# Altium PCB PAM_Interface_No_Bit_Shift.PcbDoc
Units mm, origin at the board's own origin, x right, y up, seen from the top; angles counter-clockwise.
Board outline 52 x 25 mm, 2 copper layers (Top Layer, Bottom Layer); 17 components, 14 nets, 68 pads, 23 vias.
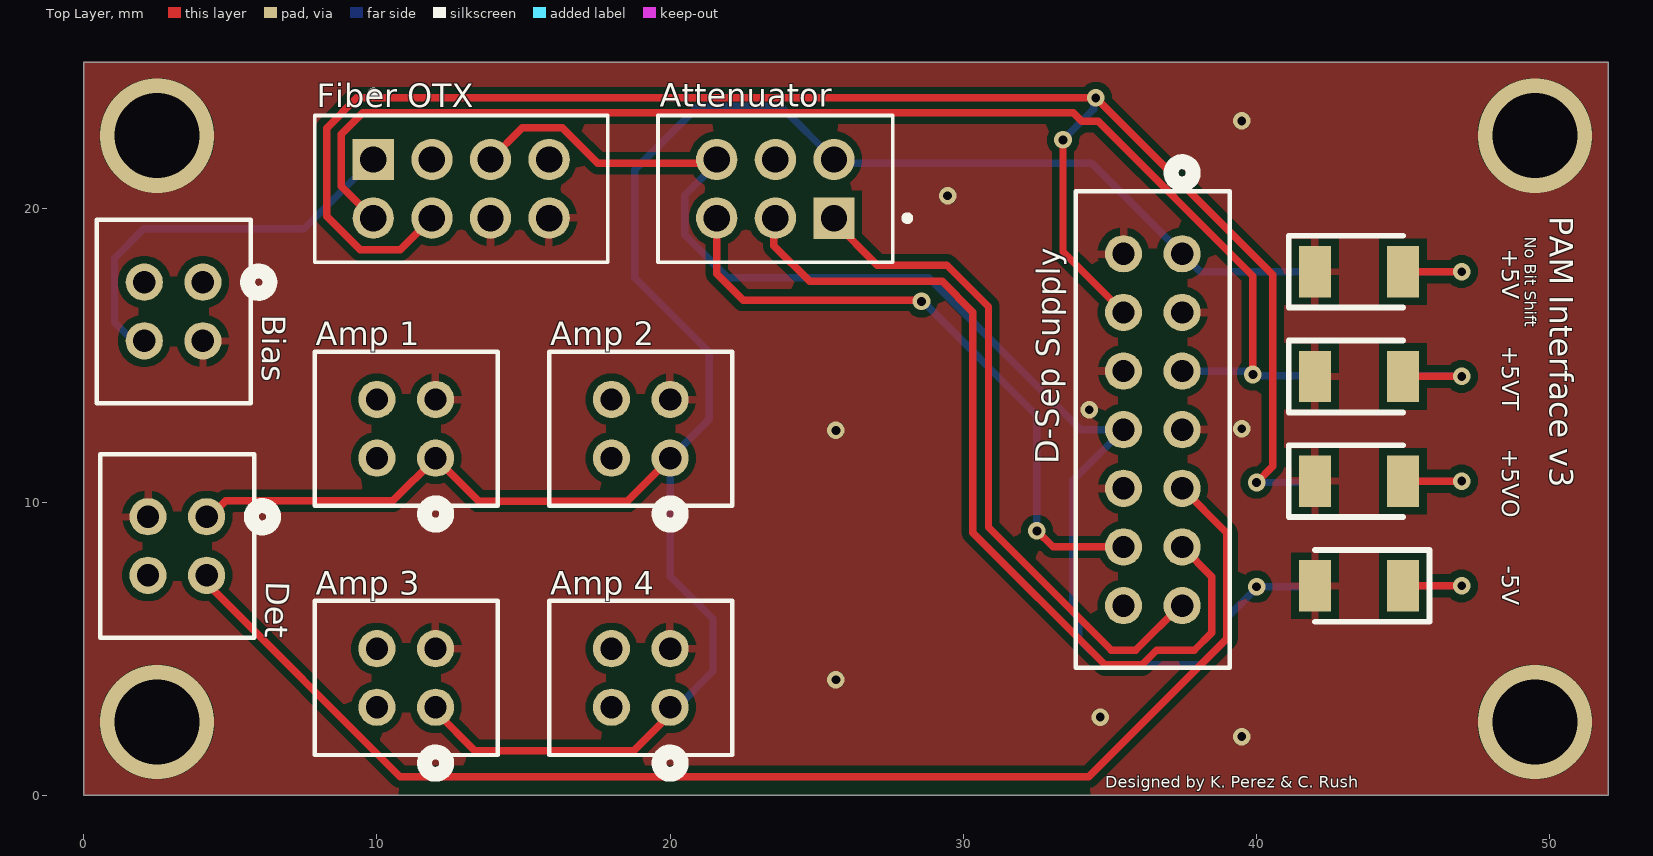
[diagram p0: Top Layer view]
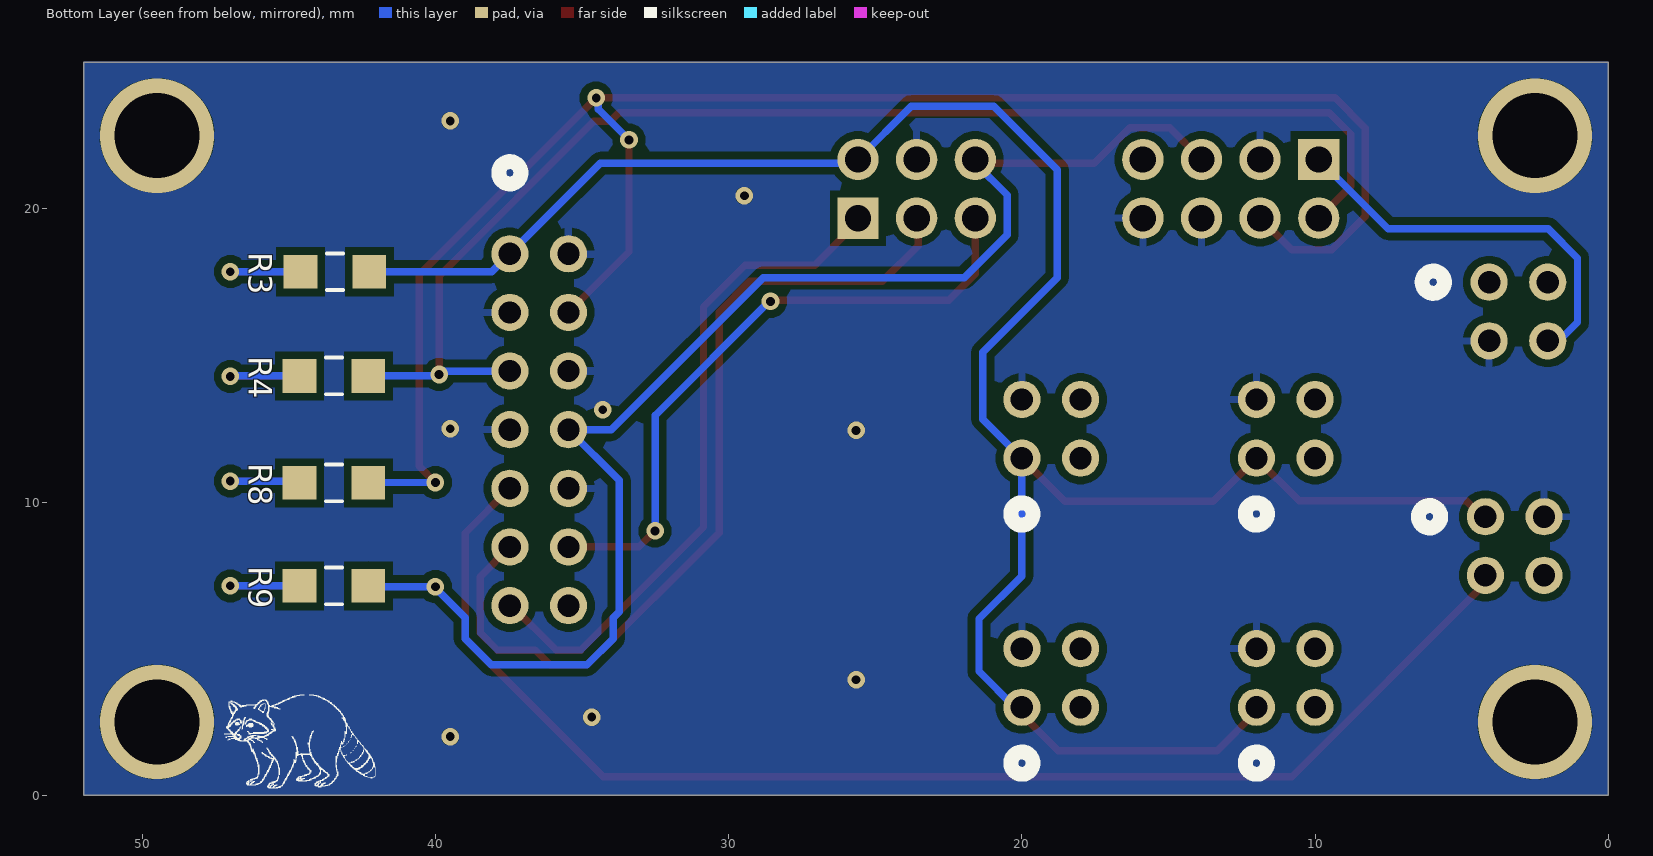
[diagram p1: Bottom Layer view, seen from below]

## Layer stack, top to bottom
Top Solder: solder mask 0.0102, Solder Resist, Dk 3.5
Top Layer: signal copper 0.0356
Dielectric 1: dielectric 0.32, FR-4, Dk 4.8
Bottom Layer: signal copper 0.0356
Bottom Solder: solder mask 0.0102, Solder Resist, Dk 3.5

## Board outline
0,0 0,25 52,25 52,0

## Design rules (kind name [scope] priority, off if disabled: settings)
Clearance [All] p1: gap=0.254 ignorepadtopadclearanceinfootprint=FALSE
ComponentClearance [All] p1: gap=0.1 collisioncheckmode=3 verticalgap=0.254 showdistances=FALSE checkcomponentboundary=TRUE
PolygonConnect [All vs IsPad] p1: connectstyle=Relief reliefconductorwidth=0.254 reliefentries=4 polygonreliefangle="90 Angle" airgapwidth=0.254
RoutingVias [All] p1: holewidth=0.711 width=1.27 viastyle="Through Hole" minholewidth=0.711 minwidth=1.27 maxholewidth=0.711 maxwidth=1.27
SolderMaskExpansion [All] p1: expansion=0.102 istentingtop=FALSE
SupplyNets "Schematic Supply Nets_9" [InNet('DET')] p1: voltage=0.000
SupplyNets "Schematic Supply Nets_8" [InNet('+5VO')] p2: voltage=0.000
SupplyNets "Schematic Supply Nets_6" [InNet('DATA')] p3: voltage=0.000
SupplyNets "Schematic Supply Nets_5" [InNet('+5VT')] p4: voltage=0.000
SupplyNets "Schematic Supply Nets_4" [InNet('CLK')] p5: voltage=0.000
SupplyNets "Schematic Supply Nets_3" [InNet('LOAD')] p6: voltage=0.000
SupplyNets "Schematic Supply Nets_2" [InNet('-5V')] p7: voltage=0.000
SupplyNets "Schematic Supply Nets_1" [InNet('+5V')] p8: voltage=0.000
SupplyNets "Schematic Supply Nets" [InNet('GND')] p9: voltage=0.000
Width [All] p1: maxlimit=0.254 minlimit=0.254 preferedwidth=0.254
29 further rules are at their usual default settings.

## Components (designator, comment, footprint, x,y, rotation, side; value= is the part's Value field where it differs from the comment)
+5V "SML-LX1206GW-TR" LEDC3216X110N 43.5,17.857 r0 top (schematic designator LED1)
+5VO "SML-LX1206GW-TR" LEDC3216X110N 43.5,10.714 r0 top
+5VT "SML-LX1206GW-TR" LEDC3216X110N 43.5,14.286 r0 top
-5V "SML-LX1206GW-TR" LEDC3216X110N 43.5,7.143 r180 top
"Amp 1" "DF11-4DP-2DSA(24)" CON4_2X2_UF_DF11_HIR 12,11.5 r0 top (schematic designator U4)
"Amp 2" "DF11-4DP-2DSA(24)" CON4_2X2_UF_DF11_HIR 20,11.5 r0 top (schematic designator U3)
"Amp 3" "DF11-4DP-2DSA(24)" CON4_2X2_UF_DF11_HIR 12,3 r0 top (schematic designator U2)
"Amp 4" "DF11-4DP-2DSA(24)" CON4_2X2_UF_DF11_HIR 20,3 r0 top (schematic designator U1)
Attenuator "DF11-6DP-2DSA(24)" HIROSE_DF11-6DP-2DSA(24) 23.59,20.685 r0 top
Bias "DF11-4DP-2DSA(24)" CON4_2X2_UF_DF11_HIR 4.064,17.5 r90 top
"D-Sep Supply" "DF11-14DP-2DSA(24)" CON14_2X7_UF_DF11_HIR 37.465,18.469 r90 top
Det "DF11-4DP-2DSA(24)" CON4_2X2_UF_DF11_HIR 4.191,9.5 r90 top (schematic designator "Power Detector Module")
"Fiber OTX" "DF11-8DP-2DSA(24)" HIROSE_DF11-8DP-2DSA(24) 12.875,20.685 r180 top
R3 "ERA6VEB1000V" RES_ERA6VEB1000V 43.434,17.857 r0 bottom
R4 "ERA6VEB1000V" RES_ERA6VEB1000V 43.467,14.303 r180 bottom
R8 "ERA6VEB1000V" RES_ERA6VEB1000V 43.467,10.656 r0 bottom
R9 "ERA6VEB1000V" RES_ERA6VEB1000V 43.467,7.143 r0 bottom

## Footprints (in the part's own frame and the unit in brackets; to place one, negate y for a bottom-side part, rotate by r counter-clockwise, add the part's x,y. Pads: shape width x height; smd on the part's side, far side on the other; paste and mask are expansions set on the pad)
CON4_2X2_UF_DF11_HIR [mm]
  round 1.27 hole 0.762 paste-2539.97 mask+0.102: 1(0,0) 2(0,2) 3(-2,0) 4(-2,2)
  silkscreen extent -4.13,-2.29 2.13,3.63
CON14_2X7_UF_DF11_HIR [mm]
  round 1.27 hole 0.762 paste-2539.97 mask+0.102: 1(0,0) 2(0,2) 3(-2,0) 4(-2,2) 5(-4,0) 6(-4,2) 7(-6,0) 8(-6,2) 9(-8,0) 10(-8,2) 11(-10,0) 12(-10,2) 13(-12,0) 14(-12,2)
  silkscreen extent -14.13,-1.63 3.14,3.63
HIROSE_DF11-6DP-2DSA(24) [mm]
  rect 1.408x1.408 / inner round 1.408 / far side rect 1.408x1.408 hole 0.9: 1(2,-1)
  round 1.408 hole 0.9: 2(2,1) 3(0,-1) 4(0,1) 5(-2,-1) 6(-2,1)
  silkscreen extent -4,-2.5 4.6,2.5
HIROSE_DF11-8DP-2DSA(24) [mm]
  rect 1.408x1.408 / inner round 1.408 / far side rect 1.408x1.408 hole 0.9: 1(3,-1)
  round 1.408 hole 0.9: 2(3,1) 3(1,-1) 4(1,1) 5(-1,-1) 6(-1,1) 7(-3,-1) 8(-3,1)
  silkscreen extent -5,-3.35 5,2.5
LEDC3216X110N [mm]
  rect 1.1x1.75 smd: 1(-1.5,0) 2(1.5,0)
  silkscreen extent -2.4,-1.22 1.5,1.22
RES_ERA6VEB1000V [mm]
  rect 1.15x1.15 smd: 1(-1.175,0) 2(1.175,0)
  silkscreen extent -0.28,-0.63 0.28,0.63

## Part data
+5V +5VO +5VT -5V: "LUMEX - SML-LX1206GW-TR - LED, 2MM X 1.6MM, GREEN, 10MCD, 565NM", Manufacturer_Name=Lumex, Mouser Part Number=696-SML-LX1206GW, Arrow Part Number=SML-LX1206GW-TR, Arrow Price/Stock=https://www.arrow.com/en/products/sml-lx1206gw-tr/lumex?region=nac, Datasheet Link=https://datasheet.datasheetarchive.com/originals/distributors/Datasheets-315/519820.pdf, Geometry.Height=1.1mm, Manufacturer_Part_Number=SML-LX1206GW-TR, Mouser Price/Stock=https://www.mouser.co.uk/ProductDetail/Lumex/SML-LX1206GW-TR?qs=k7wqd3tv8MigBobUZMRxZw%3D%3D
"Amp 1" "Amp 2" "Amp 3" "Amp 4" Bias Det: library part DF11-4DP-2DSA24, "No Description Available", Manufacturer_Name=Hirose, Copyright="Copyright (C) 2025 Ultra Librarian. All rights reserved.", Manufacturer_Part_Number=DF11-4DP-2DSA(24), RefDes=RefDes, Type=Type
Attenuator: "Connector Header Through Hole 6 position 0.079 (2.00mm)", Package=None, Check_prices=https://www.snapeda.com/parts/DF11-6DP-2DSA(24)/Hirose+Electric+Co+Ltd/view-part/?ref=eda, MF="Hirose Electric Co Ltd", MP=DF11-6DP-2DSA(24), SnapEDA_Link=https://www.snapeda.com/parts/DF11-6DP-2DSA(24)/Hirose+Electric+Co+Ltd/view-part/?ref=snap
"D-Sep Supply": library part DF11-14DP-2DSA24, "No Description Available", Manufacturer_Name=Hirose, Copyright="Copyright (C) 2025 Ultra Librarian. All rights reserved.", Manufacturer_Part_Number=DF11-14DP-2DSA(24), RefDes=RefDes, Type=Type
"Fiber OTX": "Connector Header Through Hole 8 position 0.079 (2.00mm)", Package=None, Check_prices=https://www.snapeda.com/parts/DF11-8DP-2DSA(24)/Hirose/view-part/?ref=eda, MF="Hirose Electric", MP=DF11-8DP-2DSA(24), SnapEDA_Link=https://www.snapeda.com/parts/DF11-8DP-2DSA(24)/Hirose/view-part/?ref=snap
R3 R4 R8 R9: Package=None, Availability=Unavailable, MP=ERA6VEB1000V, Price=None

## Via types
v1: diameter 0.6, hole 0.3, Top Layer to Bottom Layer, 19 vias
v2: diameter 3.9, hole 2.9, Top Layer to Bottom Layer, 4 vias

## Nets (pads, with @x,y where several pads share a name; then routed paths per layer and width w, separated by ;. In a path a pad name is that pad's centre, name@x,y a point inside that pad or via, vN(x,y) a via of type N, cw(c..) or ccw(c..) an arc to the next point about the centre after c; other vN are vias at no path point)
+5V: "Amp 1.1" "Amp 2.1" "Amp 3.1" "Amp 4.1" "D-Sep Supply.1" Attenuator.2 Det.1 R3.1 | length 73.8
  Top Layer w0.254: Det.1 4.302,9.5 4.848,10.046 10.546,10.046 12,11.5 13.467,10.033 18.542,10.033 19.558,11.049 ; 12.065,2.794 13.335,1.524 18.764,1.524 19.78,2.54
  Bottom Layer w0.254: 20,3 20.24,3 21.463,4.223 21.463,6.017 20.005,7.475 20.005,11.496 21.336,12.827 21.336,15.113 18.796,17.653 18.796,21.336 20.955,23.495 23.78,23.495 Attenuator.2 ; Attenuator.2@25.59,21.558 34.376,21.558 37.465,18.469 37.467,18.469 38.079,17.857 R3.1
+5VO: "D-Sep Supply.4" "Fiber OTX.4" R8.1 | length 61
  Top Layer w0.254: 11.875,19.685 10.79,18.6 9.426,18.6 8.282,19.744 8.282,22.757 9.311,23.786 v1(34.522,23.786) 40.559,17.749 40.559,11.222 v1(40.005,10.668) ; v1(33.401,22.352) 33.401,18.533 35.465,16.469
  Bottom Layer w0.254: v1(33.401,22.352) 34.455,23.406 34.455,23.72 v1(34.522,23.786) ; v1@39.97,10.668 42.28,10.668 R8.1
+5VT: "D-Sep Supply.5" "Fiber OTX.2" R4.2 | length 45.2
  Top Layer w0.254: 9.875,19.685 8.79,20.77 8.79,22.547 9.521,23.278 33.745,23.278 34.036,22.987 34.602,22.987 39.878,17.711 v1(39.878,14.351)
  Bottom Layer w0.254: 37.465,14.469 39.666,14.469 v1@39.784,14.351 ; v1(39.878,14.351) 39.926,14.303 R4.2
-5V: "D-Sep Supply.8" "Fiber OTX.5" Attenuator.6 R9.1 | length 47.7
  Top Layer w0.254: 13.875,21.685 14.96,22.77 16.324,22.77 17.536,21.558 Attenuator.6@21.59,21.558
  Bottom Layer w0.254: Attenuator.6@21.59,21.558 20.505,20.473 20.505,19.119 21.971,17.653 28.829,17.653 34.013,12.469 35.465,12.469 33.736,10.74 33.736,6.261 33.941,6.056 33.941,5.338 34.834,4.445 38.096,4.445 38.989,5.338 38.989,6.056 40.005,7.072 v1(40.005,7.112) 41.844,7.112 42.189,7.457 42.189,7.493 R9.1@42.292,7.596
CLK: "D-Sep Supply.11" Attenuator.3 | length 30
  Top Layer w0.254: Attenuator.3 23.542,19.637 23.542,18.749 24.765,17.526 29.28,17.526 30.325,16.481 30.325,8.954 34.834,4.445 36.096,4.445 36.604,4.953 37.886,4.953 38.481,5.548 38.481,7.453 37.465,8.469
DATA: "D-Sep Supply.12" Attenuator.5 | length 21.9
  Top Layer w0.254: Attenuator.5 21.596,19.679 21.596,17.786 22.491,16.891 28.529,16.891 v1(28.575,16.845) ; v1(32.512,9.017) 33.06,8.469 35.465,8.469
  Bottom Layer w0.254: v1(28.575,16.845) 28.621,16.845 32.512,12.954 v1(32.512,9.017)
DET: "D-Sep Supply.9" Det.3 | length 45.4
  Top Layer w0.254: Det.3@4.191,7.398 4.191,7.231 10.787,0.635 34.286,0.635 38.989,5.338 38.989,8.945 37.465,10.469
GND: "Amp 1.2" "Amp 2.2" "Amp 3.2" "Amp 4.2" "D-Sep Supply.2" "D-Sep Supply.3" "D-Sep Supply.6" "D-Sep Supply.7" "D-Sep Supply.10" "Fiber OTX.3" "Fiber OTX.6" "Fiber OTX.8" +5V.1 +5VO.1 +5VT.1 -5V.2 Attenuator.4 Bias.3 Det.2
  other v1: 39.5,2 34.671,2.667 25.654,3.937 25.654,12.446 39.5,12.5 34.295,13.15 29.464,20.447 39.5,23
  other v2: 2.5,2.5 49.5,2.5 2.5,22.5 49.5,22.5
LOAD: "D-Sep Supply.13" Attenuator.1 | length 23
  Top Layer w0.254: Attenuator.1@25.59,19.558 27.068,18.08 29.444,18.08 30.861,16.663 30.861,9.136 35.044,4.953 35.886,4.953 37.402,6.469 37.465,6.469
Net+5VO_2: +5VO.2 R8.2 | length 4.4
  Top Layer w0.254: +5VO.2 v1(47,10.714)
  Bottom Layer w0.254: R8.2 44.7,10.714 v1(47,10.714)
Net+5VT_2: +5VT.2 R4.1 | length 4.4
  Top Layer w0.254: +5VT.2 v1(47,14.286)
  Bottom Layer w0.254: R4.1 v1@47.074,14.303
Net-5V_1: -5V.1 R9.2 | length 4.4
  Top Layer w0.254: -5V.1 v1(47,7.143)
  Bottom Layer w0.254: R9.2 v1@47.022,7.143
NetBias_4: "Fiber OTX.1" Bias.4 | length 13.8
  Bottom Layer w0.254: Bias.4@2.064,15.113 1.048,16.129 1.048,18.32 2.049,19.321 7.511,19.321 9.875,21.685
NetLED1_2: +5V.2 R3.2 | length 4.4
  Top Layer w0.254: +5V.2 v1(47,17.857)
  Bottom Layer w0.254: R3.2 v1(47,17.857)
pads on no net: "Amp 1.3" "Amp 1.4" "Amp 2.3" "Amp 2.4" "Amp 3.3" "Amp 3.4" "Amp 4.3" "Amp 4.4" "D-Sep Supply.14" "Fiber OTX.7" Bias.1 Bias.2 Det.4

## Polygon pours and split planes (outlines as drawn)
GND on Top Layer "GND_L01_P000" (solid, pour order 0): 0,25.019 52,25.019 52,0 0,0
GND on Bottom Layer "GND_L02_P001" (solid, pour order 1): 0,25.019 52,25.019 52,0 0,0

## Silkscreen, mask and mechanical layers (free items; w line width, h text height)
Top Overlay:
  text "PAM Interface v3" at 50,19.75 h0.8 r270
  text "No Bit Shift" at 49.149,19.055 h0.4 r270
  text "Designed by K. Perez & C. Rush" at 34.847,0.254 h0.4
Bottom Overlay:
  drawing of 78 lines, arcs and shapes, not listed
Board:
  the board outline again, w0.254